# Altium PCB HV_Board_PCB.PcbDoc
Units mil, origin at the board's own origin, x right, y up, seen from the top; angles counter-clockwise.
Board outline 6000 x 6000 mil, 4 copper layers (Top Layer, Layer 1, Layer 2, Bottom Layer), stack 40.247 mil thick; 33 components, 21 nets, 309 pads, 13 vias.
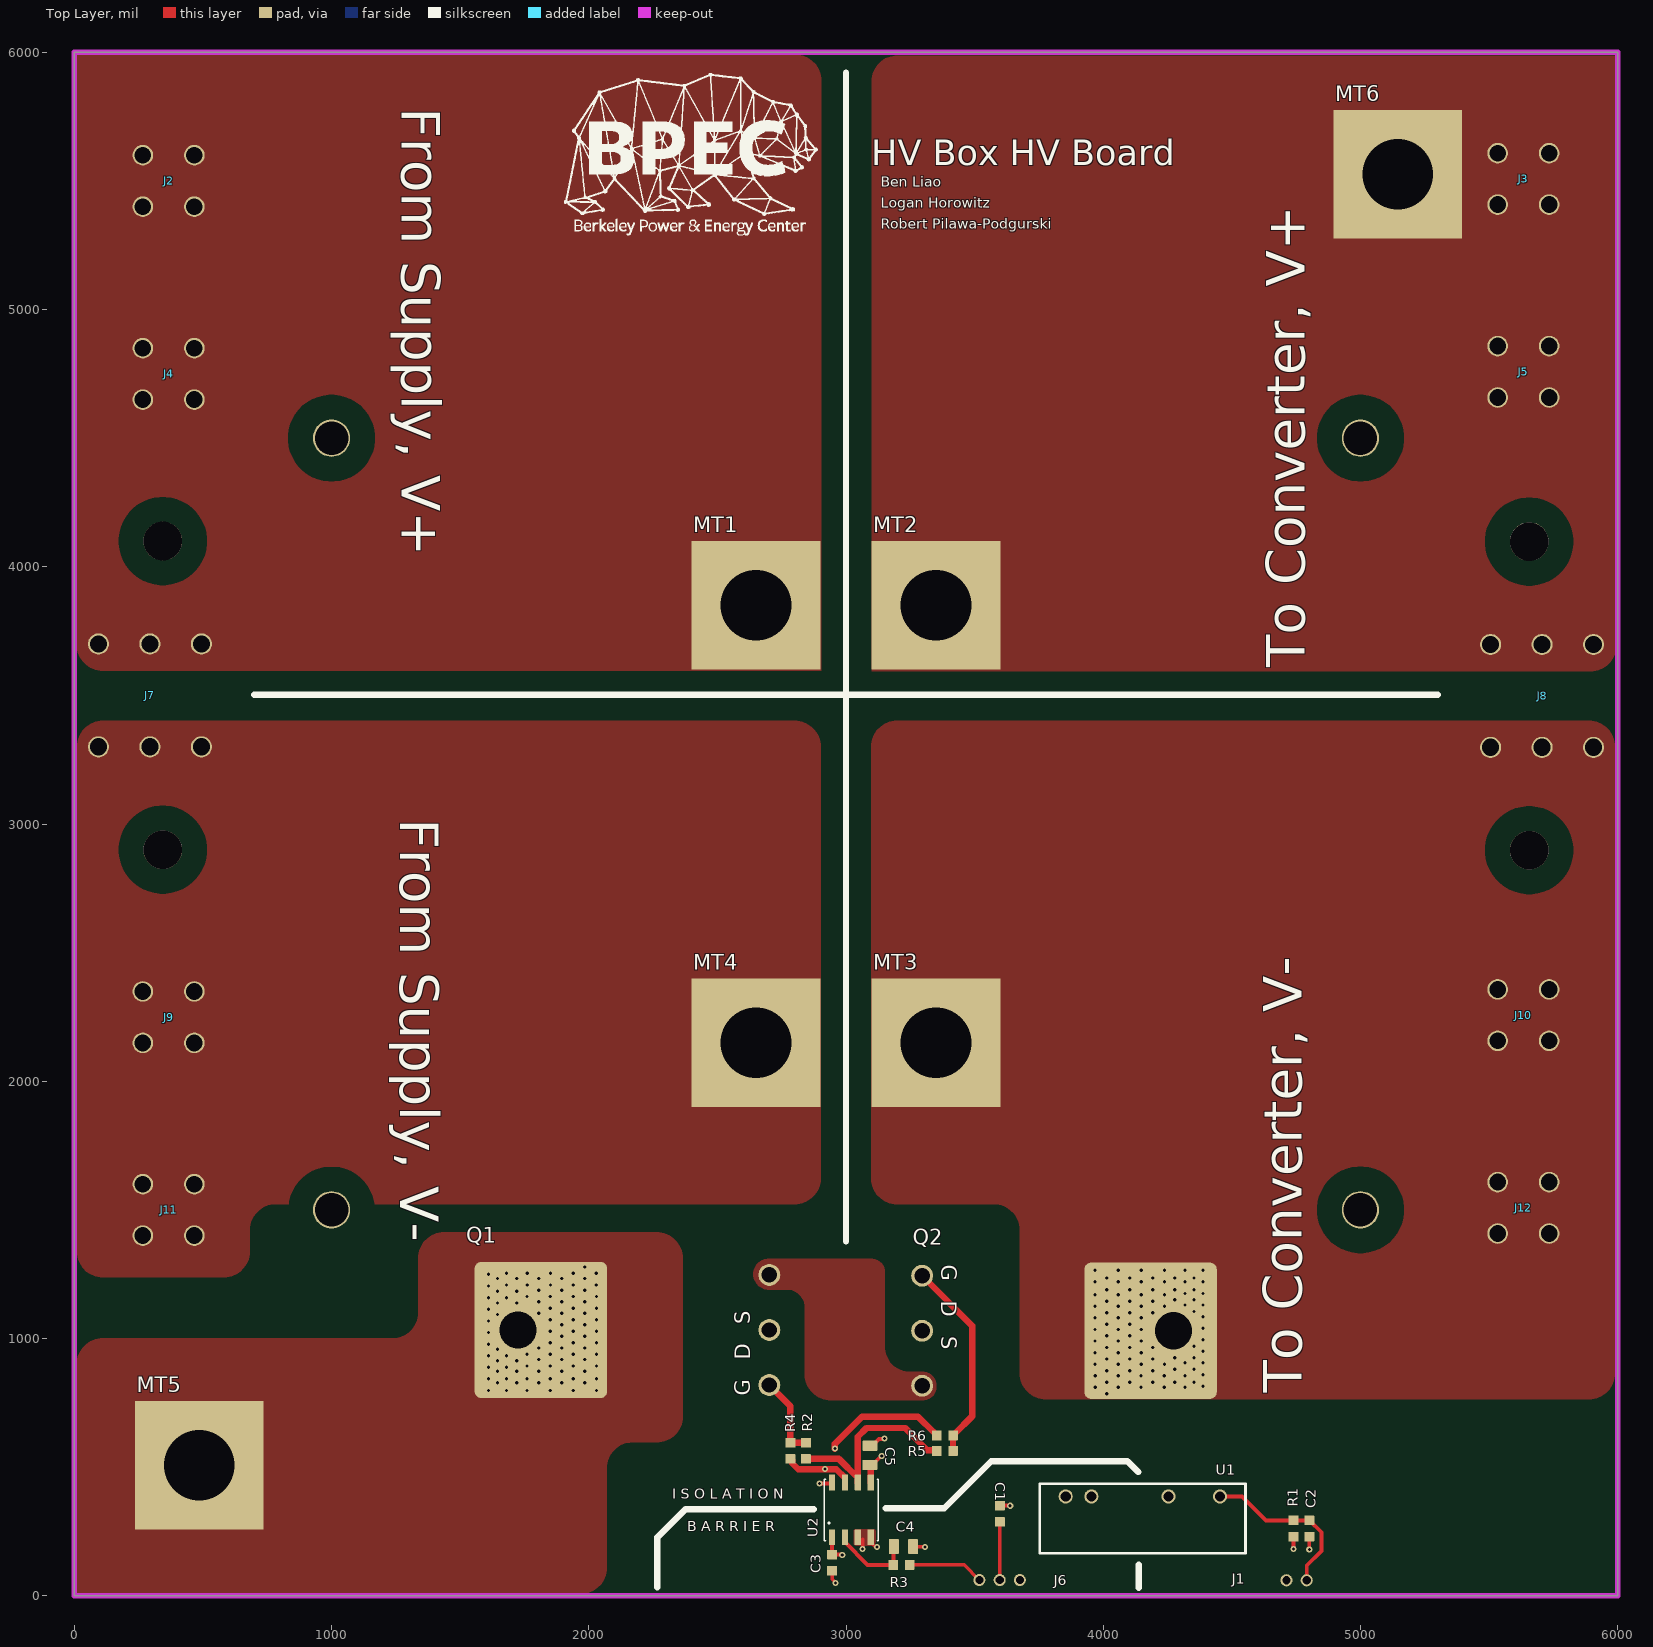
[diagram p0: Top Layer view]
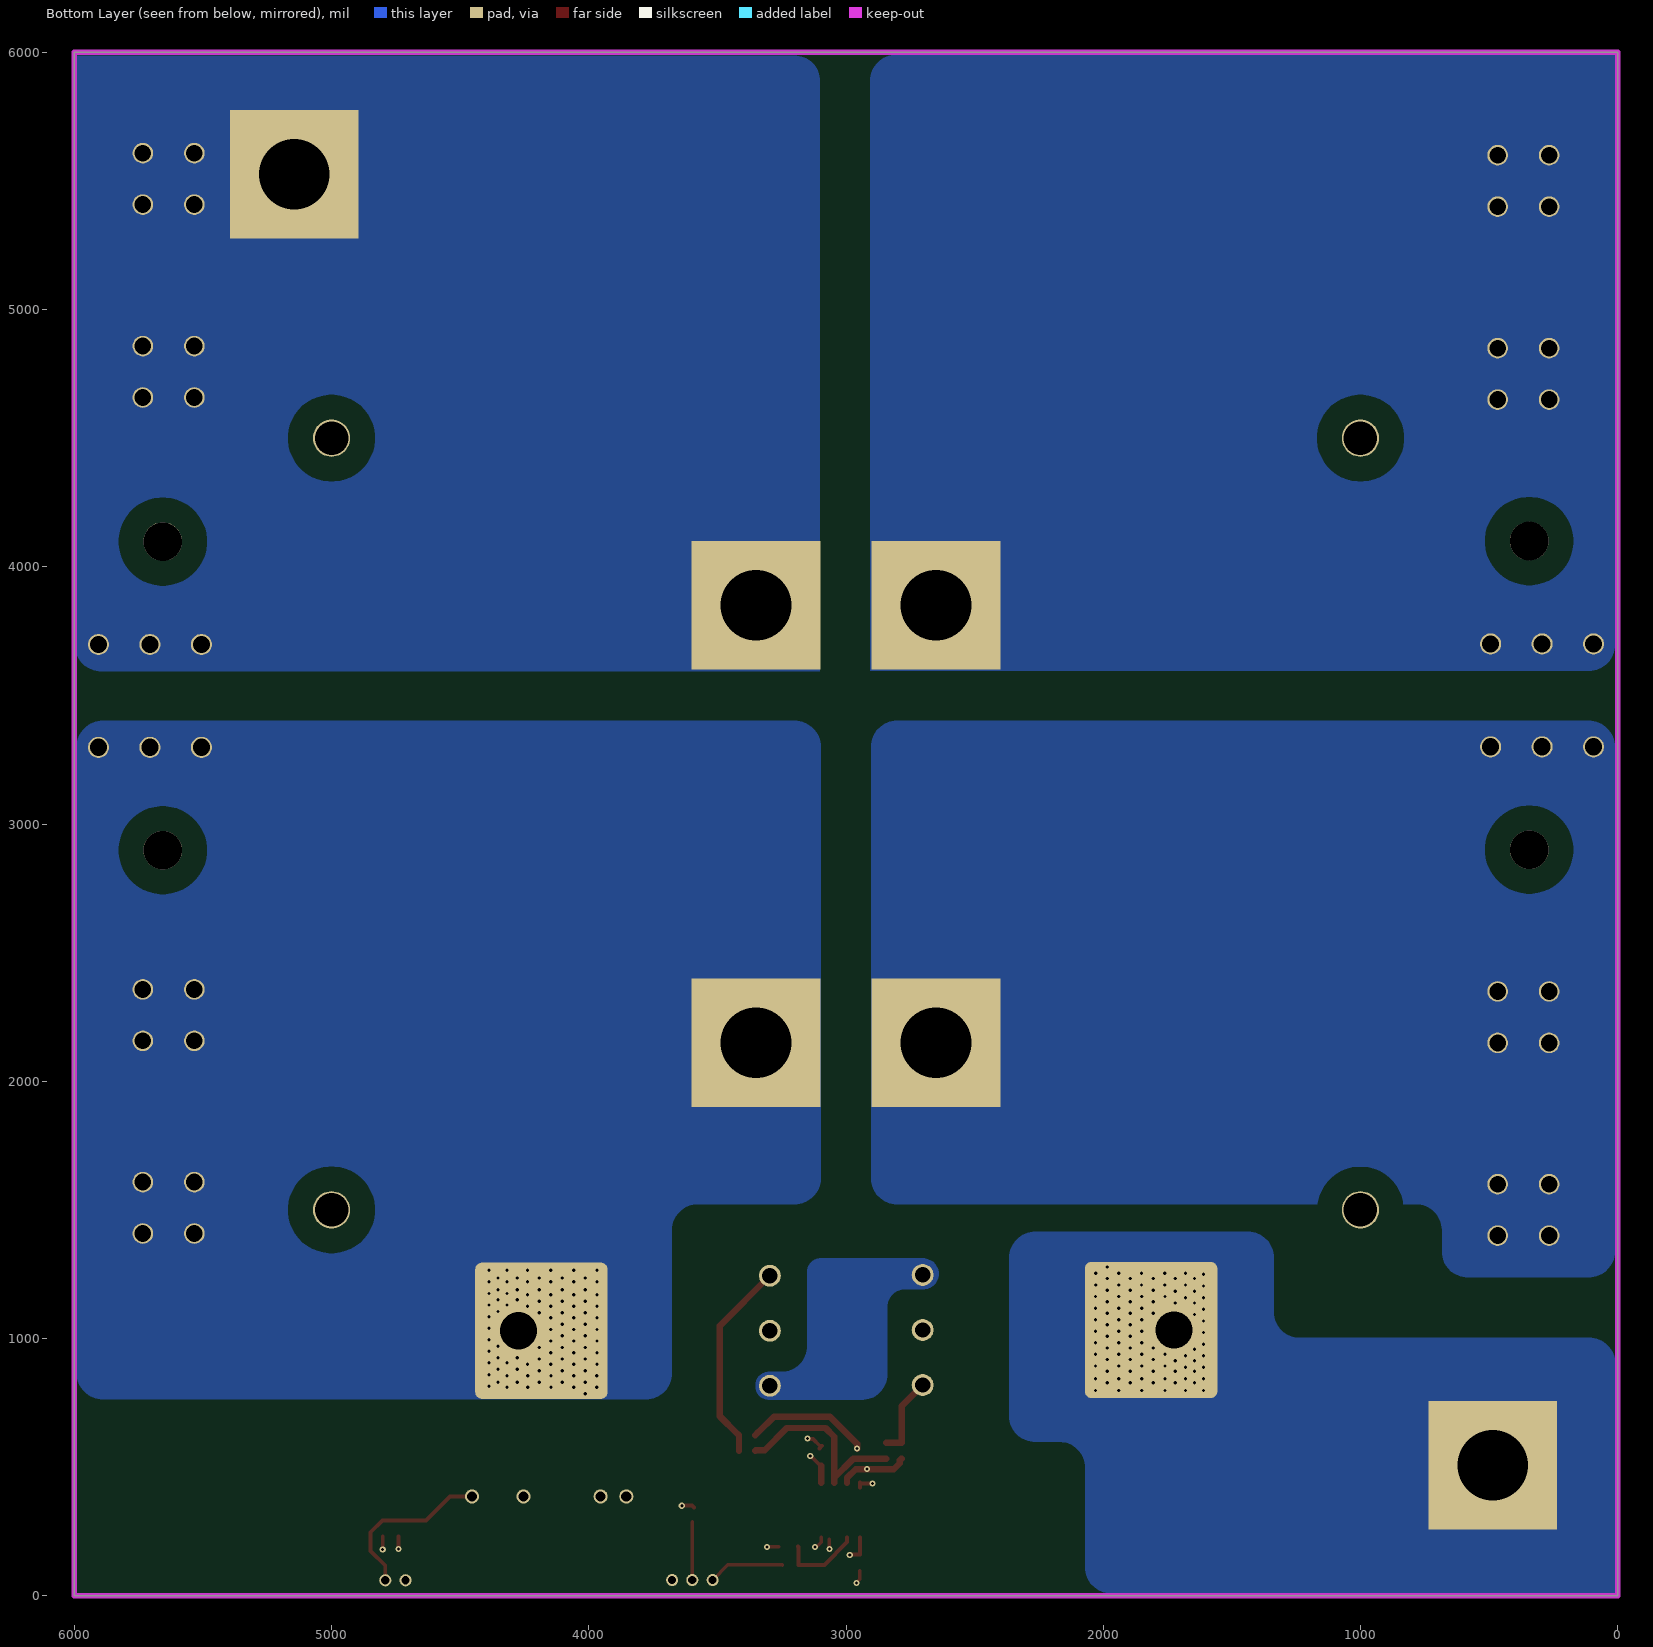
[diagram p1: Bottom Layer view, seen from below]
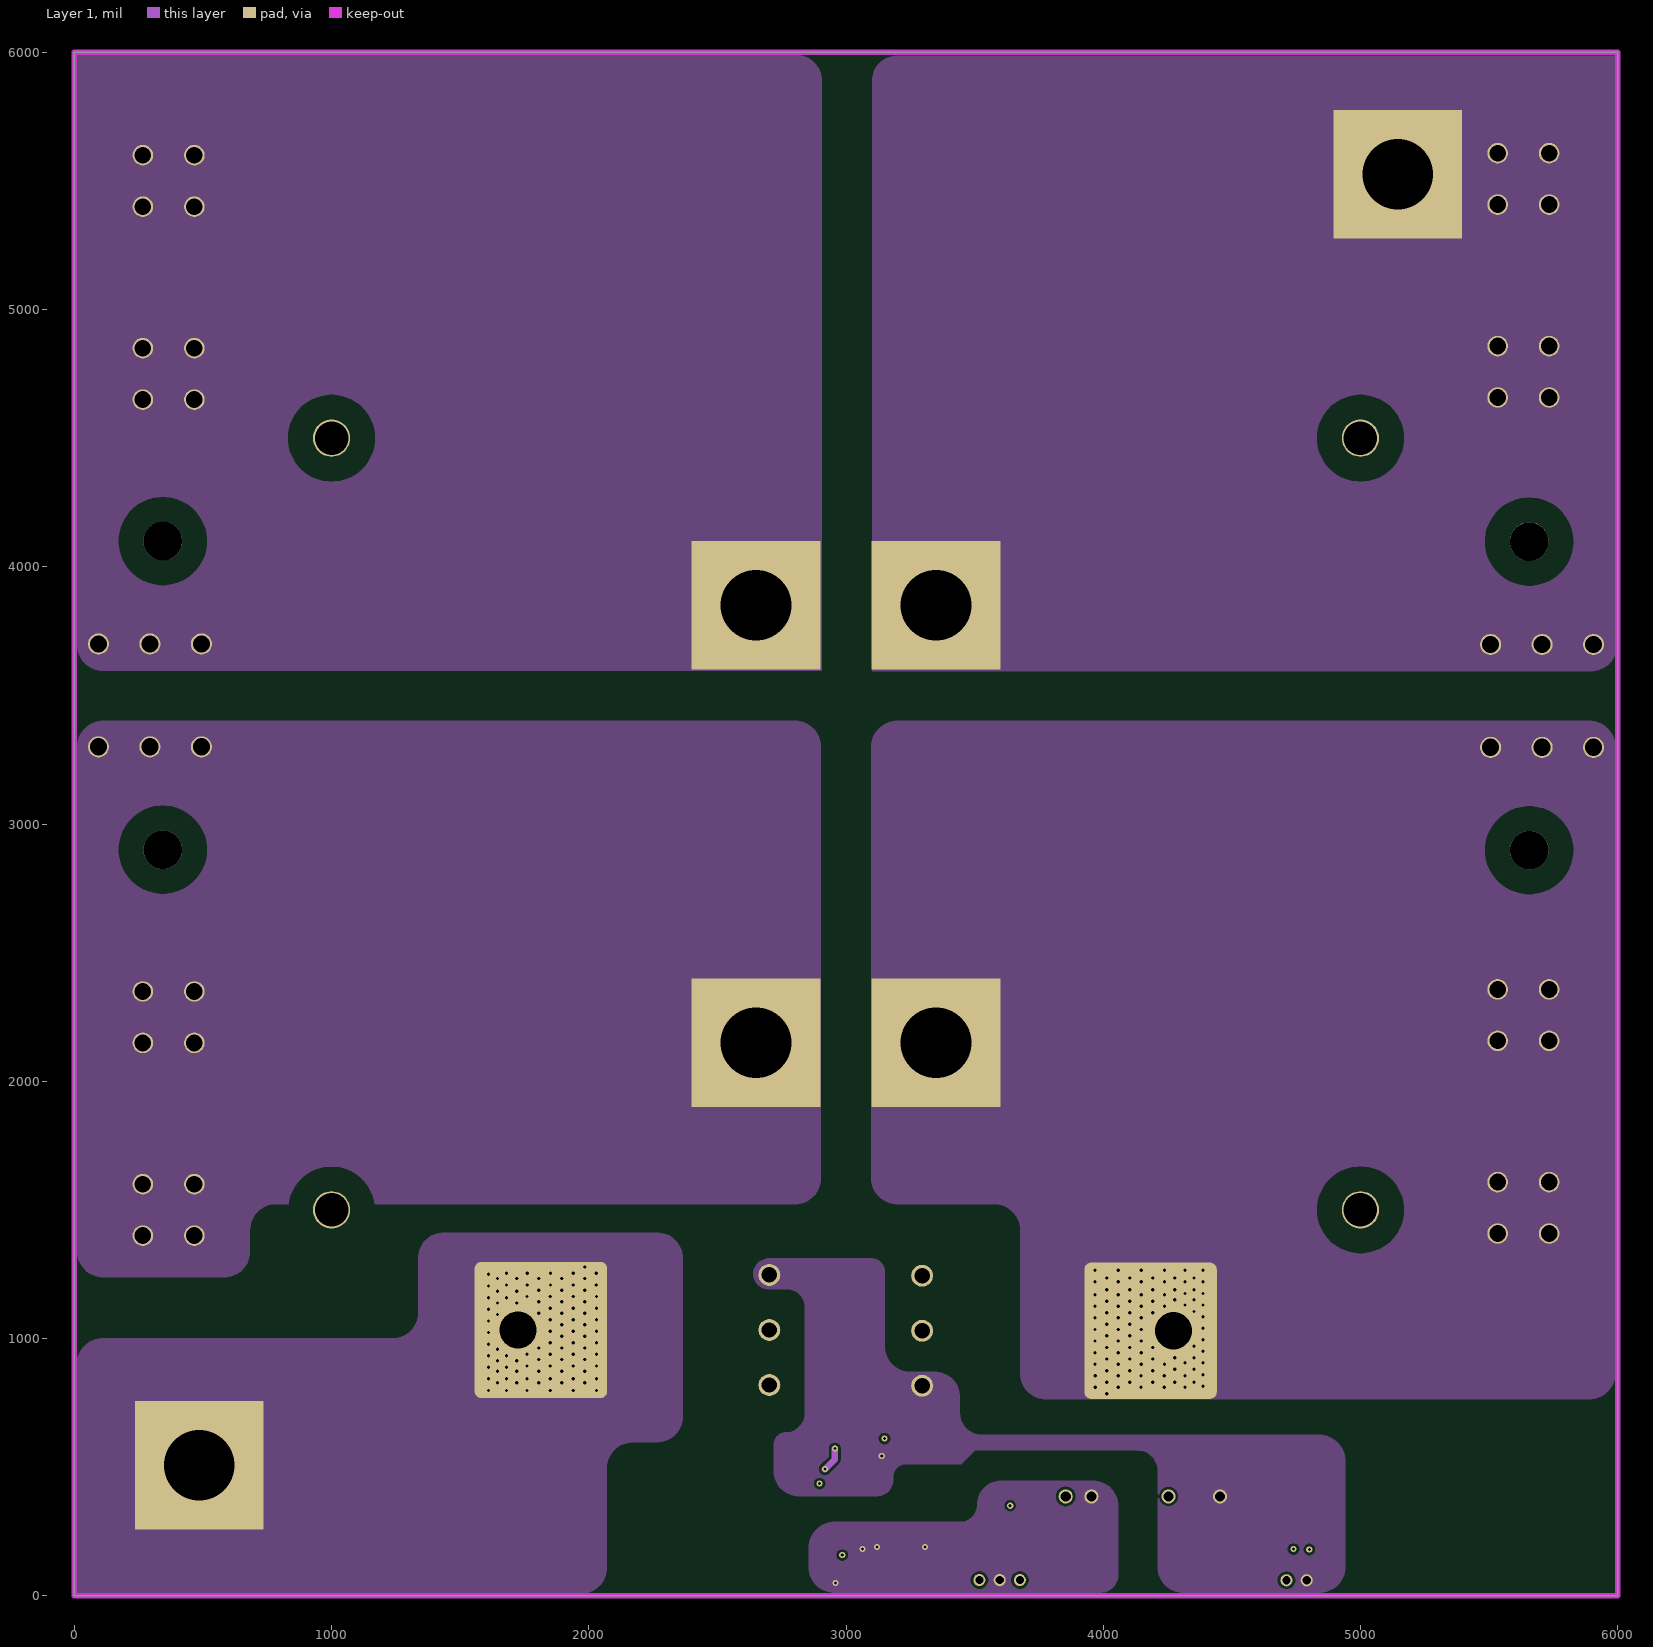
[diagram p2: Layer 1]
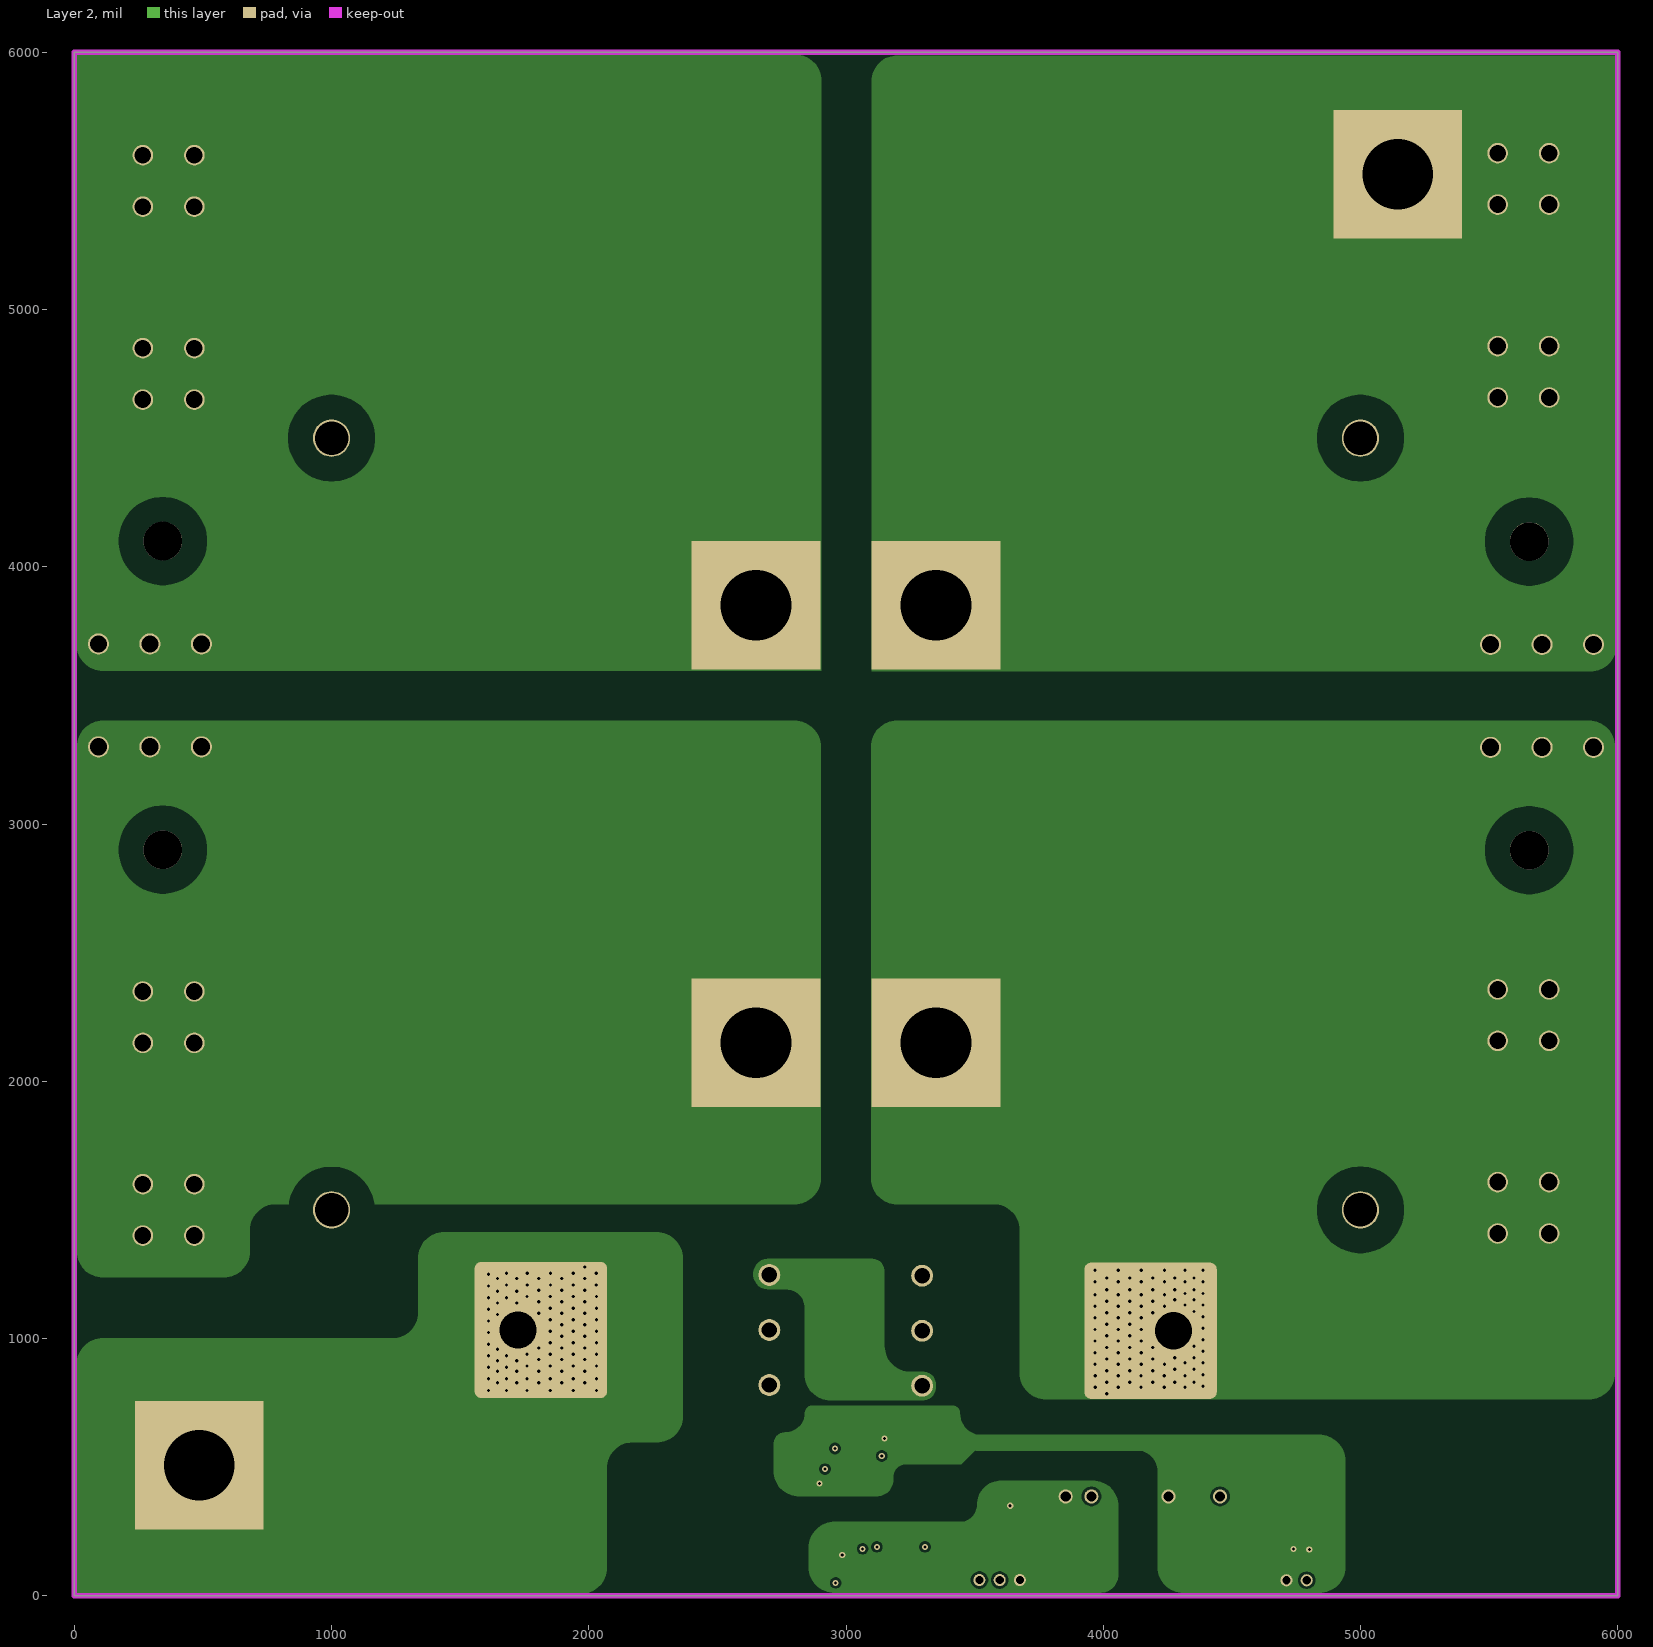
[diagram p3: Layer 2]
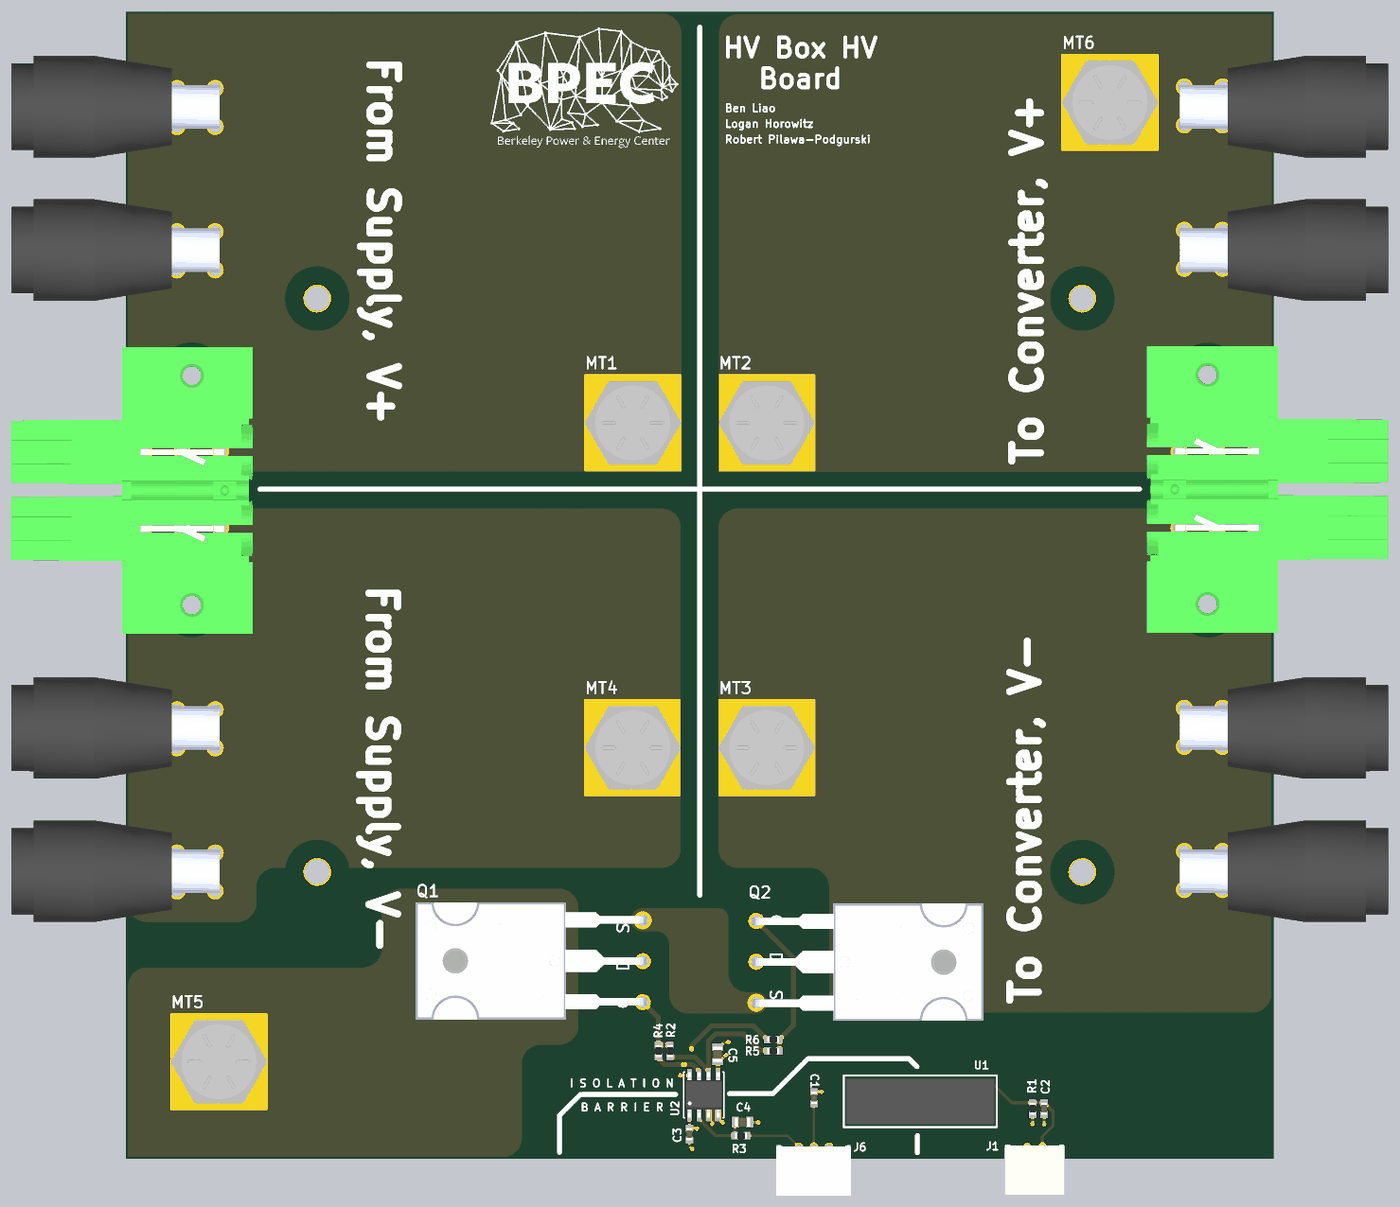
[diagram p4: 3D render of the assembled board from above, using the file's embedded part models]

## Layer stack, top to bottom
Top Solder: solder mask 0.4, Solder Resist, Dk 3.5
Top Layer: signal copper 5.5118
Dielectric 2: prepreg 2.8, PP-006, Dk 4.1
Layer 1: signal copper 5.5118
Dielectric 1: dielectric 12.6, FR-4, Dk 4.8
Layer 2: signal copper 5.5118
Dielectric 3: prepreg 2.8, PP-006, Dk 4.1
Bottom Layer: signal copper 5.5118
Bottom Solder: solder mask 0.4, Solder Resist, Dk 3.5

## Board outline
0,0 6000,0 6000,6000 0,6000

## Design rules (kind name [scope] priority, off if disabled: settings)
BoardOutlineClearance [All] p1: gap=9.84 ignorepadtopadclearanceinfootprint=FALSE
Clearance Clearance_1 [InNetClass('High Voltage') vs OnLayer('Multi-Layer')] p1: gap=96 ignorepadtopadclearanceinfootprint=FALSE
Clearance Clearance_HV [InNetClass('High Voltage') vs InNetClass('All Nets')] p2: gap=96 ignorepadtopadclearanceinfootprint=FALSE
Clearance Clearance_HV_TO_LV [InNetClass('High Voltage') vs InNetClass('Low Voltage')] p3: gap=96 ignorepadtopadclearanceinfootprint=TRUE
Clearance Clearance_HV_TO_ISO [InNetClass('High Voltage') vs InNetClass('Isolated')] p4: gap=96 ignorepadtopadclearanceinfootprint=TRUE
Clearance Clearance_ISO_TO_LV [InNetClass('Isolated') vs InNetClass('Low Voltage')] p5: gap=96 ignorepadtopadclearanceinfootprint=TRUE
Clearance Clearance_Edge [OnLayer('Keep-Out Layer')] p6: gap=0 ignorepadtopadclearanceinfootprint=FALSE
Clearance [All] p7: gap=10 ignorepadtopadclearanceinfootprint=FALSE except(0: Arc-Hole Track-Hole SMDPad-Hole THPad-Hole Via-Hole Fill-Hole Poly-Hole Region-Hole Text-Hole; 5: Arc-Arc Arc-Track Arc-SMDPad Track-Track Track-SMDPad SMDPad-SMDPad; 5.98: SMDPad-Fill SMDPad-Poly SMDPad-Region; 7.87: Via-Via)
ComponentClearance [All] p1: gap=3.94 collisioncheckmode=3 verticalgap=3.94 showdistances=FALSE
Height [All] p1: minheight=0 maxheight=3000 prefheight=500
HoleSize [All] p1: absolutevalues=TRUE maxlimit=1000 minlimit=7.87 maxpercent=80.000 minpercent=20.000
HoleToHoleClearance [All] p1: gap=19.68 allowstackedmicrovias=TRUE
MinimumAnnularRing [All] p1: minimumring=5.12
MinimumSolderMaskSliver [All] p1 off: minsoldermaskwidth=7.87
PlaneConnect [All] p1: planeconnectstyle=Direct reliefexpansion=20 reliefentries=4 reliefconductorwidth=10 reliefairgap=10
PolygonConnect [All] p1: connectstyle=Direct reliefconductorwidth=39.37 reliefentries=4 polygonreliefangle="90 Angle" airgapwidth=9.84
RoutingVias [All] p1: holewidth=11.81 width=23.62 viastyle="Through Hole" minholewidth=11.81 minwidth=23.62 maxholewidth=248.03 maxwidth=393.7
SolderMaskExpansion [All] p1: expansion=4 istentingtop=FALSE
Width [All] p1: maxlimit=393.7 minlimit=13 preferedwidth=15 minimp=50.000000 maximp=50.000000 favimp=50.000000
24 further rules are at their usual default settings.

## Classes and differential pairs
net class "Low Voltage": +12 GND NetC4_2 NetJ1_3 NetQ2_2 NetQ3_2 NetU3_2 NetU3_4 NetU3_10 NetU3_11 NetU3_15 PHX1_MT1 PHX1_MT2 PHX2_MT1 PHX2_MT2 V_RES_OUT
net class Isolated: ISO_GND JFET_SOURCE NetQ1_1 NetQ2_1 NetR2_1 NetR4_1
net class "High Voltage": NetJ2_1 NetJ7_2 NetMT5_1 Q1_D_Pin Q2_D_Pin RAIL1 RAIL2

## Components (designator, comment, footprint, x,y, rotation, side; value= is the part's Value field where it differs from the comment)
C1 "2.2uF" 0603_CAP 3598,287 r90 top
C2 "2.2uF" 0603_CAP 4801,229.75 r90 top
C3 "100nF" 0603_CAP 2946,96.75 r90 top
C4 "47nF,0805" 0805_CAP 3261,191 r180 top
C5 "10uF" 0805_CAP 3093,583 r270 top
J1 "JST2" JST_2 4791,60 r180 top
J2 "Banana" BANANA_PLUG 266.65,5400 r0 top
J3 "Banana" BANANA_PLUG 5733.35,5608 r180 top
J4 "Banana" BANANA_PLUG 266.65,4650 r0 top
J5 "Banana" BANANA_PLUG 5733.35,4858 r180 top
J6 "JST3" JST_3 3676,60.7 r180 top
J7 "J_Phoenix_76A" PHOENIX_CONNECTOR_76A 294,3500 r270 top
J8 "J_Phoenix_76A" PHOENIX_CONNECTOR_76A 5706,3498 r90 top
J9 "Banana" BANANA_PLUG 266.65,2149 r0 top
J10 "Banana" BANANA_PLUG 5733.35,2357 r180 top
J11 "Banana" BANANA_PLUG 266.65,1400 r0 top
J12 "Banana" BANANA_PLUG 5733.35,1608 r180 top
MT1 "Screw" MOUNT_SMALL 2650,3850 r0 top
MT2 "Screw" MOUNT_SMALL 3350,3850 r0 top
MT3 "Screw" MOUNT_SMALL 3350,2150 r0 top
MT4 "Screw" MOUNT_SMALL 2650,2150 r0 top
MT5 "Screw" MOUNT_SMALL 486,507 r0 top
MT6 "Screw" MOUNT_SMALL 5145,5526 r0 top
Q1 "JFET" TO247 2702,819 r90 top
Q2 "JFET" TO247 3296,1244 r270 top
R1 "3.3k" 0603_RES 4740,229.75 r90 top
R2 "51" 0603_RES 2844,531.75 r90 top
R3 "10k" 0603_RES 3247,120 r180 top
R4 "51" 0603_RES 2784,531.75 r90 top
R5 "51" 0603_RES 3353,563 r0 top
R6 "51" 0603_RES 3353,623 r0 top
U1 "U_Power_Isolator" SIP7 4154,386 r180 top
U2 "U_Isolated_Gate_Drive" GATE_DRIVER 3021,333.25 r90 top

## Footprints (in the part's own frame and the unit in brackets; to place one, negate y for a bottom-side part, rotate by r counter-clockwise, add the part's x,y. Pads: shape width x height; smd on the part's side, far side on the other; paste and mask are expansions set on the pad)
0603_CAP [mil] "SMD 0603 Capacitor Footprint"
  rrect10% 37x39 smd: 1(0,0) 2(63,0)
  body extent 0,-15 63,16, height 32
0603_RES [mil] "SMD 0603 Resistor Footprint"
  rrect10% 37x39 smd: 1(0,0) 2(63,0)
  body extent 0,-16 63,16, height 18
0805_CAP [mil] "SMD 0805 Capacitor Footprint"
  rrect10% 39x57 smd: 1(0,0) 2(75,0)
  body extent -2,-25 77,25, height 49
BANANA_PLUG [mil] "Banana Plug Footprint"
  round 80 hole 65: 1(0,0) 1(0,200) 1(200,0) 1(200,200)
  body extent -867,-162 224,370, height 564
GATE_DRIVER [mil] "Isolated Gate Driver Footprint 8-SOIC"
  rrect10% 61x24 smd: 1(-106.5,75) 2(-106.5,25) 3(-106.5,-25) 4(-106.5,-75) 5(106.5,-75) 6(106.5,-25) 7(106.5,25) 8(106.5,75)
  silkscreen extent -120,-105 120,105, body extent -118,-97 118,97, height 69
JST_2 [mil] "2-pin JST Header Footprint, PH series"
  round 47 hole 32: 1(0,0) 2(78.7,0)
  body extent -116,-14 197,252, height 197
JST_3 [mil] "3-pin JST Header Footprint, PH series"
  round 47 hole 32: 1(0,0) 2(78.7,0) 3(157.4,0)
  body extent -115,-10 277,256, height 197
MOUNT_SMALL [mil] "M6/M5 Screw Mount Footprint"
  rect 500x500 hole 275 paste-99999: 1(0,0)
  body extent -251,-219 251,219, height 174
PHOENIX_CONNECTOR_76A [mil] "Jack Phoenix Connector  76 A rated per position 1 kV 2x1 Footprint"
  round 82 hole 67: 1(-200,200) 1(-200,0) 1(-200,-200) 2(200,200) 2(200,0) 2(200,-200)
  round 150 hole 150: 3(-600,50) 4(600,50)
  body extent -746,-894 753,368, height 535
SIP7 [mil] "12 V - 12 V Isolated DC-DC Converter Footprint SIP 7 4 leads"
  round 55 hole 40: 1(-300,0) 3(-100,0) 6(200,0) 7(300,0)
  silkscreen extent -399,-49 401,221, body extent -387,-31 387,205, height 400
TO247 [mil] "TO247 High Power FET Footprint"
  round 85 hole 60: 1(0,0) 2(214,0) 3(428,0)
  round 25 hole 13 paste-99999 mask+4: 4(-21,1092) 4(-21,1022) 4(-21,942) 4(-21,852) 4(-21,762) 4(-21,672) 4(9,1057) 4(9,982) 4(9,897) 4(9,807) 4(9,717) 4(24,1092) 4(24,1022) 4(24,942) 4(24,852) 4(24,762) 4(24,672) 4(54,1057) 4(54,897) 4(54,982) 4(54,807) 4(54,717) 4(69,1092) 4(69,1022) 4(74,852) 4(74,942) 4(74,672) 4(74,762) 4(94,1057) 4(94,982) 4(99,897) 4(99,717) 4(99,807) 4(114,1092) 4(114,1022) 4(119,852) 4(119,942) 4(119,672) 4(119,762) 4(139,1057) 4(144,717) 4(144,807) 4(144,897) 4(159,1092) 4(164,762) 4(164,852) 4(164,672) 4(189,717) 4(189,807) 4(204,1092) 4(209,762) 4(209,852) 4(209,672) 4(234,717) 4(234,807) 4(249,1092) 4(254,762) 4(254,852) 4(254,672) 4(274,1057) 4(279,717) 4(279,807) 4(279,897) 4(294,1092) 4(299,672) 4(299,762) 4(299,852) 4(319,982) 4(319,1057) 4(324,717) 4(324,807) 4(324,897) 4(339,1022) 4(339,1092) 4(344,672) 4(344,762) 4(344,852) 4(344,942) 4(364,982) 4(364,1057) 4(369,717) 4(369,807) 4(369,897) 4(385,1092) 4(389,673) 4(389,762) 4(389,851) 4(389,941) 4(389,1022) 4(414,717) 4(414,807) 4(414,896) 4(414,982) 4(414,1057) 4(430,1092) 4(434,673) 4(434,762) 4(434,851) 4(434,941) 4(434,1022) 4(459,717)
  rrect10% 530x515 hole 145 copper offset 0,-89 paste-99999: 4(214,977)
  rrect10% 530x515 on Top Paste: 6(213,887)
  body extent -91,-16 523,1188, height 197

## Part data
C1 C2: library part C_2.2uF_0603, "Capacitor SMD MLCC 2.2 uF 0603"
C3: library part C_100nF_0603, "Capacitor SMD MLCC 100 nF 0603"
C4: library part C_47nF_0805, "Capacitor SMD MLCC 47 nF 0805, C0G/NP0"
C5: library part C_10uF_0805, "Capacitor SMD MLCC 10 uF 0805"
J1: library part J_JST_2, "Jack JST 2-pin"
J2 J3 J4 J5 J9 J10 J11 J12: library part J_Banana, "Banana Plug"
J6: library part J_JST_3, "Jack JST 3-pin"
J7 J8: "Phoenix Connector, Female, 2 position, 76 A, 1 kV per position"
MT1 MT2 MT3 MT4 MT5 MT6: library part MT_Screw_Small, "M5/M6 Screw Mount for connecting board to resistors"
Q1 Q2: library part Q_JFET, "N-Channel JFET1200 V 34 A TO 247-3"
R1: library part R_3300Ohm_0603_1%, "Resistor 3.3 kOhm 0603 1%"
R2 R4 R5 R6: library part R_51Ohm_0603_1%, "Resistor 51 Ohm 0603 1%"
R3: library part R_10kOhm_0603_1%, "Resistor 10 kOhm 0603 1%"
U1: library part U_12_12_Power_Isolator, "12 V -> 12 V DC-DC isolated converter, 84 mW output current, SIP7 4-lead package, 3 kV isolation"
U2: "IC Isolated Gate Drive 3-15 V Output Supply Split Output"

## Free pads (board coordinates)
  round 145 hole 130: 1(1000,1500) 1(1000,4500) 1(5000,1500) 1(5000,4500)

## Via types
v1: diameter 23.62, hole 11.81, Top Layer to Bottom Layer, 13 vias

## Nets (pads, with @x,y where several pads share a name; then routed paths per layer and width w, separated by ;. In a path a pad name is that pad's centre, name@x,y a point inside that pad or via, vN(x,y) a via of type N, cw(c..) or ccw(c..) an arc to the next point about the centre after c; other vN are vias at no path point)
+12: C1.2 C3.2 J6.1 U1.7 U2.1 | length 158.7
  Top Layer w15: U2.1 C3.2 2983.4,159.75 cw(c2983.4,157.73) v1(2985.42,157.73) ; C1.2@3590.63,342.63 C1.2 3638.42,350 v1(3638.42,349.73)
GND: C1.1 C3.1 C4.1 J6.2 U1.6 U2.3 U2.4 | length 413.2
  Top Layer w13: C3.1 2946,64 v1(2960,50) ; v1(3064.76,182.28) 3064.76,218.76 3065,219 ; U2.4 3096,208.25 3114.25,190 v1(3120,190) ; C4.1 3262,190 v1(3307,190) ; J6.2@3596.6,60 J6.2 3597.3,286.7 C1.1@3597,287
ISO_GND: C2.1 C5.1 J1.2 R1.1 U1.3 U2.8 | length 251.4
  Top Layer w15: v1(2897.77,435.69) 2941.95,435.69 ccw(c2941.95,439.75) U2.8 U2.8@2946,421.25 ; C5.1@3103.33,572.67 C5.1 3102,583 3128.05,609.05 3148.12,609.05 v1(3149.77,610.69) ; R1.1@4739,229.75 R1.1 v1(4740,181) ; v1(4801,180) C2.1
JFET_SOURCE: C2.2 C5.2 J1.1 Q1.3 Q2.3 R1.2 U1.1 U2.5 | length 786
  Top Layer w15: C5.2@3096,505 3099,505 3137,543 v1(3139,543) ; U1.1 4539,386 4632.25,292.75 R1.2 C2.2 4802,292.75 4848,246.75 4848,174 4791,117 J1.1
  Top Layer w25: U2.5 C5.2@3096,505
NetC4_2: C4.2 R3.2 U2.2 | length 314.9
  Top Layer w15: U2.2 2996,208.25 3084.25,120 R3.2 3185,121 3185,190 C4.2
NetJ2_1: J2.1 J4.1 J7.1 MT1.1
NetJ7_2: J7.2 J9.1 J11.1 MT4.1
NetMT5_1: MT5.1 Q1.4
NetQ1_1: Q1.1 R2.2 R4.2 | length 318.2
  Top Layer w25: Q1.1 2784,737 R4.2 R2.2
NetQ2_1: Q2.1 R5.2 R6.2 | length 792.6
  Top Layer w25: Q2.1 3490,1050 3490,697 3423,630 3422,630 3416,624 R5.2
NetR2_1: R2.1 R5.1 U2.6 | length 768.6
  Top Layer w25: R2.1 2972.5,531.75 U2.6@3046,458.25 ; U2.6 U2.6@3046,458.25 ; R5.1 3350.03,565.97 3316.03,565.97 3230,652 3080,652 3046,618 U2.6@3046,458.25
NetR4_1: R4.1 R6.1 U2.7 | length 852.6
  Top Layer w25: R4.1 2785,531.75 2791,525.75 2791,515 2814.25,491.75 2918,491.75 2962.5,491.75 2996,458.25 U2.7 ; v1(2957,572) 2957,590.78 3062.22,696 3280,696 3341,635 3342,635 3353,624 R6.1
  Layer 1 w25: v1(2918,492) 2957,531 v1(2957,572)
PHX1_MT1: J7.3
PHX1_MT2: J7.4
PHX2_MT1: J8.3
PHX2_MT2: J8.4
Q1_D_Pin: Q1.2
Q2_D_Pin: Q2.2
RAIL1: J3.1 J5.1 J8.2 MT2.1 MT6.1
RAIL2: J8.1 J10.1 J12.1 MT3.1 Q2.4
V_RES_OUT: J6.3 R3.1 | length 297.2
  Top Layer w13: R3.1@3247,119 R3.1 3459.3,120 J6.3
pads on no net: Q1.6 Q2.6

## Polygon pours and split planes (outlines as drawn)
RAIL1 on Top Layer "RAIL1_L01_P110" (solid, pour order 110): 5994.28,5987.34 5994.28,3693.34 cw(c5894.28,3693.34) 5894.28,3593.34 3100.28,3593.34 3100.28,5887.34 cw(c3200.28,5887.34) 3200.28,5987.34
NetJ2_1 on Top Layer "NETJ2_1_L01_P109" (solid, pour order 109): 10,5990 10,3696 ccw(c110,3696) 110,3596 2904,3596 2904,5890 ccw(c2804,5890) 2804,5990
RAIL2 on Top Layer "RAIL2_L01_P108" (solid, pour order 108): 3098,3301 cw(c3198,3301) 3198,3401 5889,3401 cw(c5889,3301) 5989,3301 5989,864 cw(c5889,864) 5889,764 3776,764 cw(c3776,864) 3676,864 3676,1422 ccw(c3576,1422) 3576,1522 3198,1522 cw(c3198,1622) 3098,1622
NetJ7_2 on Top Layer "NETJ7_2_L01_P107" (solid, pour order 107): 2901,3301 ccw(c2801,3301) 2801,3401 111,3401 ccw(c111,3301) 11,3301 11,1338 ccw(c111,1338) 111,1238 582,1238 ccw(c582,1338) 682,1338 682,1422 cw(c782,1422) 782,1522 2801,1522 ccw(c2801,1622) 2901,1622
NetMT5_1 on Top Layer "NETMT5_1_L01_P137" (solid, pour order 137): 10,8 10,900 cw(c110,900) 110,1000 1237,1000 ccw(c1237,1100) 1337,1100 1337,1312 cw(c1437,1312) 1437,1412 2265,1412 cw(c2265,1312) 2365,1312 2365,696 cw(c2265,696) 2265,596 2170,596 ccw(c2170,496) 2070,496 2070,108 cw(c1970,108) 1970,8
GND on Top Layer "GND_L01_P049" (solid, pour order 49): 3108,259 cw(c3108,252) 3115,252 3115,211 cw(c3098,211) 3098,194 3039,194 cw(c3039,202) 3031,202 3031,253 cw(c3037,253) 3037,259
JFET_SOURCE on Top Layer "JFET_SOURCE_L01_P046" (solid, pour order 46): 2700,1310 ccw(c2700,1250) 2640,1250 ccw(c2700,1250) 2700,1190 2770,1190 cw(c2770,1120) 2840,1120 2840,860 ccw(c2940,860) 2940,760 3300,760 ccw(c3300,810) 3350,810 3350,820 ccw(c3300,820) 3300,870 3250,870 cw(c3250,970) 3150,970 3150,1260 ccw(c3100,1260) 3100,1310
RAIL1 on Layer 1 "RAIL1_L02_P116" (solid, pour order 116): 5995.28,5987.34 5995.28,3693.34 cw(c5895.28,3693.34) 5895.28,3593.34 3101.28,3593.34 3101.28,5887.34 cw(c3201.28,5887.34) 3201.28,5987.34
NetJ2_1 on Layer 1 "NETJ2_1_L02_P115" (solid, pour order 115): 11,5990 11,3696 ccw(c111,3696) 111,3596 2905,3596 2905,5890 ccw(c2805,5890) 2805,5990
RAIL2 on Layer 1 "RAIL2_L02_P114" (solid, pour order 114): 3099,3301 cw(c3199,3301) 3199,3401 5890,3401 cw(c5890,3301) 5990,3301 5990,864 cw(c5890,864) 5890,764 3777,764 cw(c3777,864) 3677,864 3677,1422 ccw(c3577,1422) 3577,1522 3199,1522 cw(c3199,1622) 3099,1622
NetJ7_2 on Layer 1 "NETJ7_2_L02_P113" (solid, pour order 113): 2902,3301 ccw(c2802,3301) 2802,3401 112,3401 ccw(c112,3301) 12,3301 12,1338 ccw(c112,1338) 112,1238 583,1238 ccw(c583,1338) 683,1338 683,1422 cw(c783,1422) 783,1522 2802,1522 ccw(c2802,1622) 2902,1622
JFET_SOURCE on Layer 1 "JFET_SOURCE_L02_P104" (solid, pour order 104): 2840,851.15 2840,710 cw(c2765,710) 2765,635 ccw(c2765,589) 2719,589 2719,486 ccw(c2819,486) 2819,386 3118,386 ccw(c3118,452) 3184,452 3184,461 cw(c3235,461) 3235,512 3449,511 3503,565 4134,564 cw(c4134,486) 4212,486 4212,111 ccw(c4312,111) 4312,11 4840,11 ccw(c4840,111) 4940,111 4940,525 ccw(c4840,525) 4840,625 3528,625 cw(c3528,710) 3443,710 3443,771 ccw(c3343,771) 3343,871 3304.92,871
GND on Layer 1 "GND_L02_P053" (solid, pour order 53): 4059,347 ccw(c3959,347) 3959,447 3604,447 ccw(c3604,353) 3510,353 cw(c3444,353) 3444,287 2956,287 ccw(c2956,187) 2856,187 2856,111 ccw(c2956,111) 2956,11 3986,11 ccw(c3986,84) 4059,84 4059,141
NetMT5_1 on Layer 1 "NETMT5_1_L02_P135" (solid, pour order 135): 10.03,7.89 10.03,899.89 cw(c110.03,899.89) 110.03,999.89 1237.03,999.89 ccw(c1237.03,1099.89) 1337.03,1099.89 1337.03,1311.89 cw(c1437.03,1311.89) 1437.03,1411.89 2265.03,1411.89 cw(c2265.03,1311.89) 2365.03,1311.89 2365.03,695.89 cw(c2265.03,695.89) 2265.03,595.89 2170.03,595.89 ccw(c2170.03,495.89) 2070.03,495.89 2070.03,107.89 cw(c1970.03,107.89) 1970.03,7.89
JFET_SOURCE on Layer 1 "JFET_SOURCE_L02_P063" (solid, pour order 63): 2700,1311 ccw(c2700,1251) 2640,1251 ccw(c2700,1251) 2700,1191 2770,1191 cw(c2770,1121) 2840,1121 2840,861 ccw(c2940,861) 2940,761 3300,761 ccw(c3300,811) 3350,811 3350,821 ccw(c3300,821) 3300,871 3250,871 cw(c3250,971) 3150,971 3150,1261 ccw(c3100,1261) 3100,1311
ISO_GND on Layer 2 "ISO_GND_L03_P128" (solid, pour order 128): 2719,486 ccw(c2819,486) 2819,386 3118,386 ccw(c3118,452) 3184,452 3184,461 cw(c3235,461) 3235,512 3449,511 3503,565 3504,564 4133,564 cw(c4133,485) 4212,485 4212,111 ccw(c4312,111) 4312,11 4840,11 ccw(c4840,111) 4940,111 4940,525 ccw(c4840,525) 4840,625 3527,625 cw(c3527,709) 3443,709 ccw(c3413,709) 3413,739 2870,739 ccw(c2870,709) 2840,709 cw(c2767,709) 2767,636 2766,636 ccw(c2766,589) 2719,589
RAIL1 on Layer 2 "RAIL1_L03_P121" (solid, pour order 121): 5994.28,5987.34 5994.28,3693.34 cw(c5894.28,3693.34) 5894.28,3593.34 3100.28,3593.34 3100.28,5887.34 cw(c3200.28,5887.34) 3200.28,5987.34
NetJ2_1 on Layer 2 "NETJ2_1_L03_P120" (solid, pour order 120): 10,5990 10,3696 ccw(c110,3696) 110,3596 2904,3596 2904,5890 ccw(c2804,5890) 2804,5990
RAIL2 on Layer 2 "RAIL2_L03_P119" (solid, pour order 119): 3098,3301 cw(c3198,3301) 3198,3401 5889,3401 cw(c5889,3301) 5989,3301 5989,864 cw(c5889,864) 5889,764 3776,764 cw(c3776,864) 3676,864 3676,1422 ccw(c3576,1422) 3576,1522 3198,1522 cw(c3198,1622) 3098,1622
NetJ7_2 on Layer 2 "NETJ7_2_L03_P118" (solid, pour order 118): 2901,3301 ccw(c2801,3301) 2801,3401 111,3401 ccw(c111,3301) 11,3301 11,1338 ccw(c111,1338) 111,1238 582,1238 ccw(c582,1338) 682,1338 682,1422 cw(c782,1422) 782,1522 2801,1522 ccw(c2801,1622) 2901,1622
+12 on Layer 2 "+12_L03_P105" (solid, pour order 105): 4059,347 ccw(c3959,347) 3959,447 3604,447 ccw(c3604,353) 3510,353 cw(c3444,353) 3444,287 2956,287 ccw(c2956,187) 2856,187 2856,111 ccw(c2956,111) 2956,11 3986,11 ccw(c3986,84) 4059,84 4059,141
NetMT5_1 on Layer 2 "NETMT5_1_L03_P136" (solid, pour order 136): 10,8 10,900 cw(c110,900) 110,1000 1237,1000 ccw(c1237,1100) 1337,1100 1337,1312 cw(c1437,1312) 1437,1412 2265,1412 cw(c2265,1312) 2365,1312 2365,696 cw(c2265,696) 2265,596 2170,596 ccw(c2170,496) 2070,496 2070,108 cw(c1970,108) 1970,8
JFET_SOURCE on Layer 2 "JFET_SOURCE_L03_P072" (solid, pour order 72): 2699.5,1310.5 ccw(c2699.5,1250.5) 2639.5,1250.5 ccw(c2699.5,1250.5) 2699.5,1190.5 2769.5,1190.5 cw(c2769.5,1120.5) 2839.5,1120.5 2839.5,860.5 ccw(c2939.5,860.5) 2939.5,760.5 3299.5,760.5 ccw(c3299.5,810.5) 3349.5,810.5 3349.5,820.5 ccw(c3299.5,820.5) 3299.5,870.5 3249.5,870.5 cw(c3249.5,970.5) 3149.5,970.5 3149.5,1260.5 ccw(c3099.5,1260.5) 3099.5,1310.5
RAIL1 on Bottom Layer "RAIL1_L04_P126" (solid, pour order 126): 5995.28,5987.34 5995.28,3693.34 cw(c5895.28,3693.34) 5895.28,3593.34 3101.28,3593.34 3101.28,5887.34 cw(c3201.28,5887.34) 3201.28,5987.34
NetJ2_1 on Bottom Layer "NETJ2_1_L04_P125" (solid, pour order 125): 11,5990 11,3696 ccw(c111,3696) 111,3596 2905,3596 2905,5890 ccw(c2805,5890) 2805,5990
RAIL2 on Bottom Layer "RAIL2_L04_P124" (solid, pour order 124): 3099,3301 cw(c3199,3301) 3199,3401 5890,3401 cw(c5890,3301) 5990,3301 5990,864 cw(c5890,864) 5890,764 3777,764 cw(c3777,864) 3677,864 3677,1422 ccw(c3577,1422) 3577,1522 3199,1522 cw(c3199,1622) 3099,1622
NetJ7_2 on Bottom Layer "NETJ7_2_L04_P123" (solid, pour order 123): 2902,3301 ccw(c2802,3301) 2802,3401 112,3401 ccw(c112,3301) 12,3301 12,1338 ccw(c112,1338) 112,1238 583,1238 ccw(c583,1338) 683,1338 683,1422 cw(c783,1422) 783,1522 2802,1522 ccw(c2802,1622) 2902,1622
NetMT5_1 on Bottom Layer "NETMT5_1_L04_P134" (solid, pour order 134): 10,10 10,902 cw(c110,902) 110,1002 1237,1002 ccw(c1237,1102) 1337,1102 1337,1314 cw(c1437,1314) 1437,1414 2265,1414 cw(c2265,1314) 2365,1314 2365,698 cw(c2265,698) 2265,598 2170,598 ccw(c2170,498) 2070,498 2070,110 cw(c1970,110) 1970,10
JFET_SOURCE on Bottom Layer "JFET_SOURCE_L04_P073" (solid, pour order 73): 2700,1311 ccw(c2700,1251) 2640,1251 ccw(c2700,1251) 2700,1191 2770,1191 cw(c2770,1121) 2840,1121 2840,861 ccw(c2940,861) 2940,761 3300,761 ccw(c3300,811) 3350,811 3350,821 ccw(c3300,821) 3300,871 3250,871 cw(c3250,971) 3150,971 3150,1261 ccw(c3100,1261) 3100,1311

## Keep-outs
Keep-Out Layer:
  the board outline again, w20

## Silkscreen, mask and mechanical layers (free items; w line width, h text height)
Top Overlay:
  drawing of 38 lines, arcs and shapes, not listed
  text "From Supply, V+" at 1272.98,5785 h150 r270
  text "HV Box HV Board" at 3097.5,5560 h100
  text "Ben Liao" at 3135.43,5478 h40
  text "Logan Horowitz" at 3135.43,5396.16 h40
  text "Robert Pilawa-Podgurski" at 3135.43,5314.33 h40
  text "To Converter, V+" at 4783.02,3610 h150 r90
  text "From Supply, V-" at 1267.98,3021 h150 r270
  text "To Converter, V-" at 4772.02,789 h150 r90
  text "I S O L A T I O N" at 2324.77,376.01 h40
  text "B A R R I E R" at 2382.19,250.01 h40

## Text inside footprints (layer, text, board x,y; h text height)
Q1: Top Overlay "G   D   S" at 2628,777 h60 r90
Q2: Top Overlay "G   D   S" at 3370,1286 h60 r270